# Allegro board fei.brd
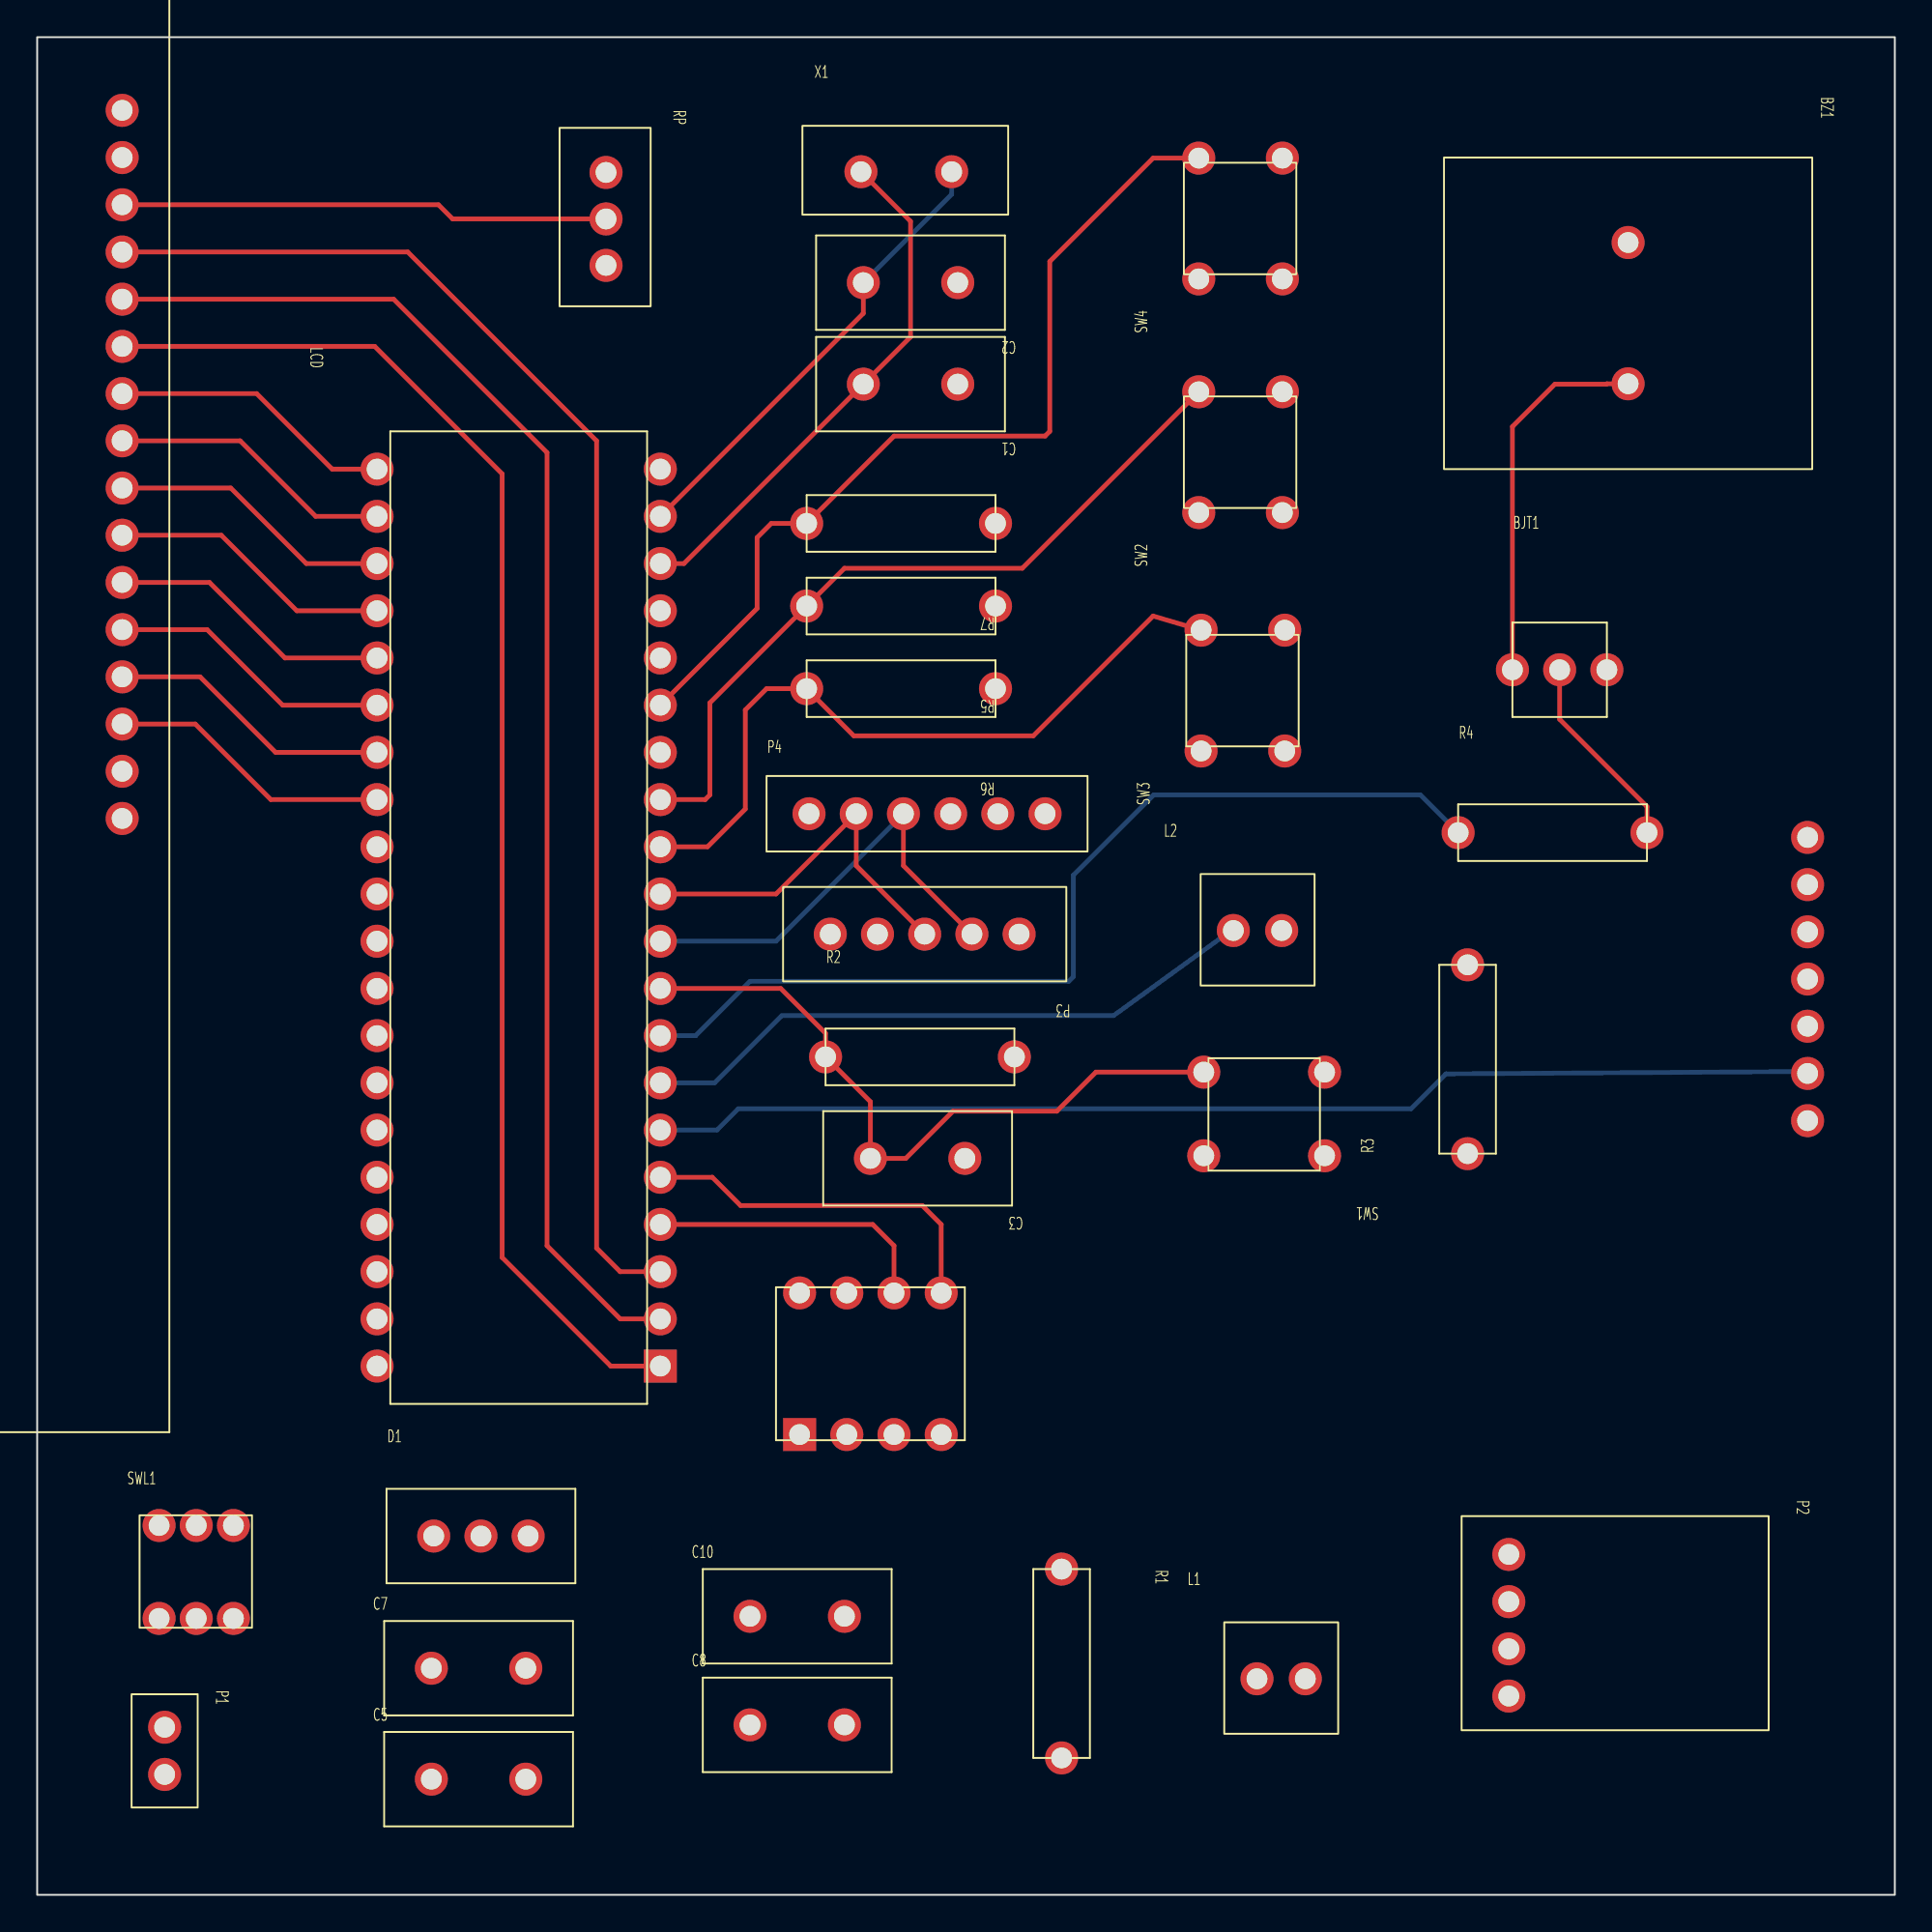
[diagram p0: board, top side]
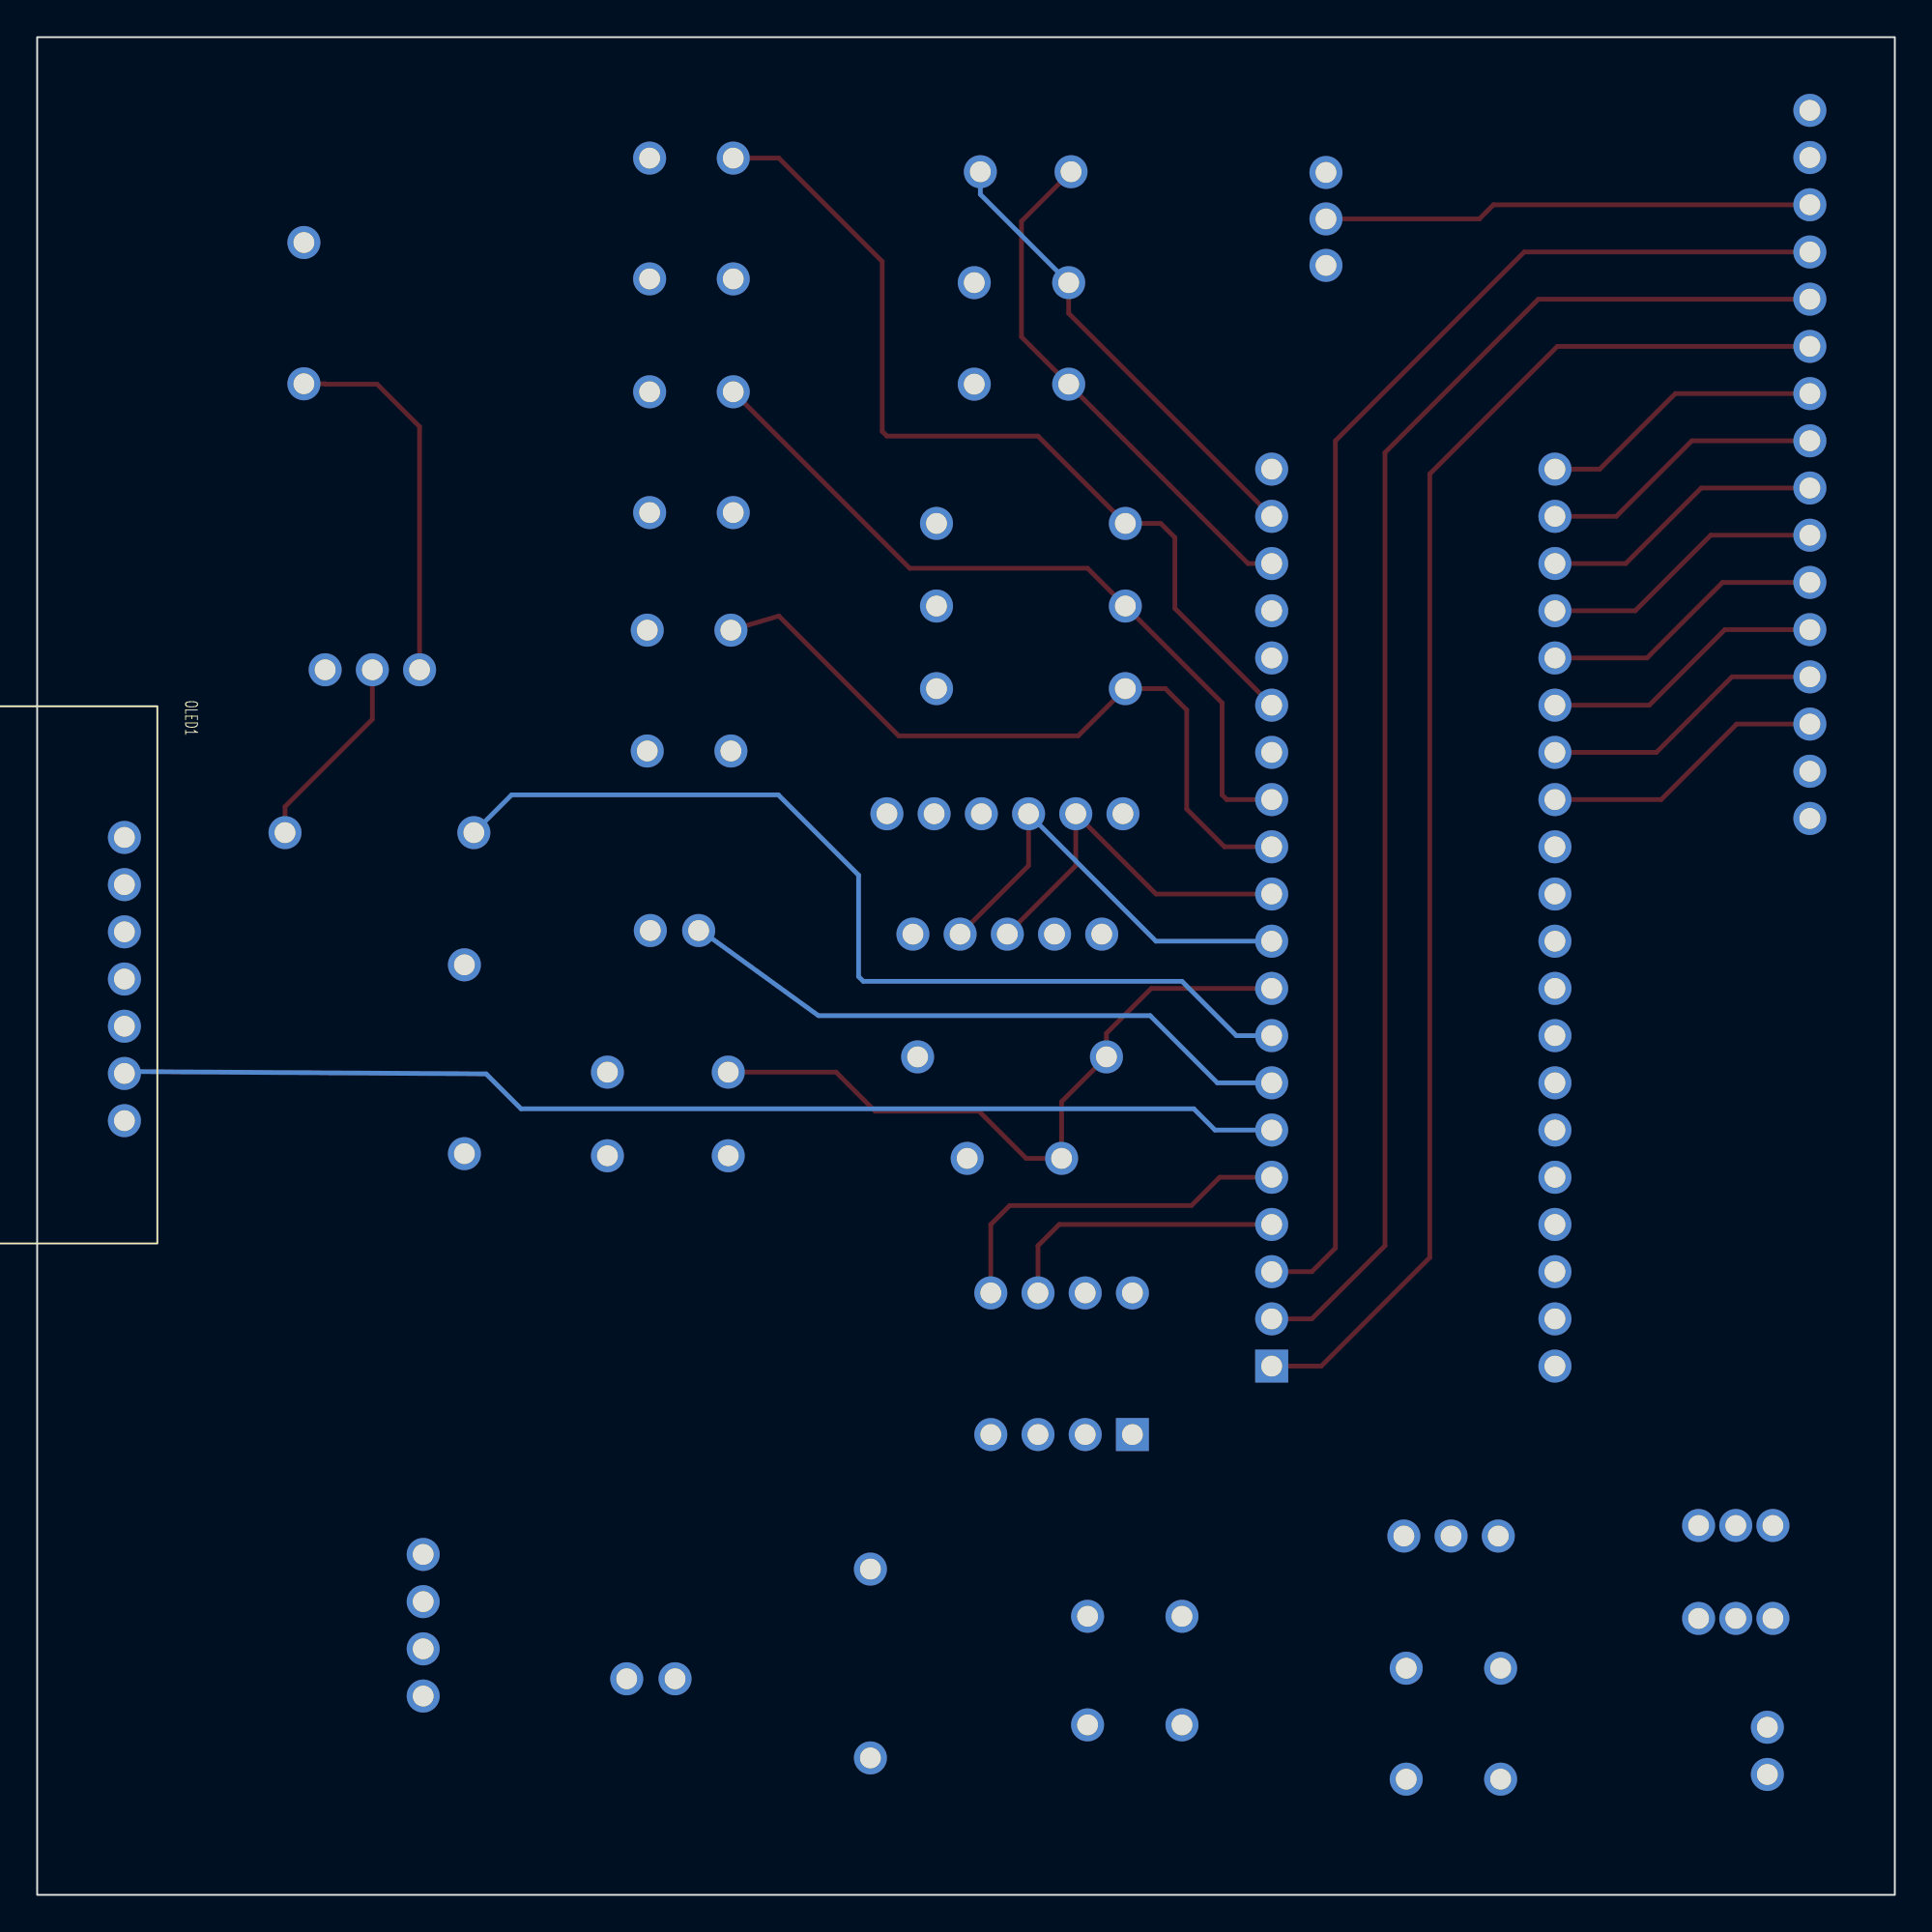
[diagram p1: board, bottom side, seen from below]

Outline 99.95 x 99.95 mm; copper layers: TOP, BOTTOM. Coordinates in mm from the lower left corner of the outline.
Outline path: rectangle 0,0 99.95,99.95

## Design rules (mm)
constraint set DEFAULT: min track width 0.127

## Placement (name value [footprint] x y rotation side)
AT1  -  [AT24C02]  44.83 28.57 90 top
BJT1  -  [BJT_PNP]  -139.06 -254.13 0 top
BZ1  -  [BUZZ]  85.6 85.09 270 top
C1  -  [CAPACITANCE]  46.99 81.28 180 top
C2  -  [CAPACITANCE]  46.99 86.74 180 top
C3  -  [CAPACITANCE]  47.37 39.62 180 top
C5  -  [CAPACITANCE]  23.75 6.22 0 top
C7  -  [CAPACITANCE]  23.75 12.19 0 top
C8  -  [CAPACITANCE]  40.89 9.14 0 top
C10  -  [CAPACITANCE]  40.89 14.99 0 top
D1  -  [L7805]  1.02 11.68 0 top
L1  -  [LED]  66.94 11.62 0 top
L2  -  [LED]  65.67 51.88 0 top
LCD  -  [LCD1602]  2.03 78.23 270 top
OLED1  -  [OLED]  108.23 49.4 270 bottom
P1  -  [SOCKET2]  6.86 7.75 270 top
P2  -  [MLX90614]  83.02 14.53 270 top
P3  -  [SOCKET5]  47.75 51.69 180 top
P4  -  [SOCKET6]  47.88 58.17 0 top
R1  -  [RESISTOR]  55.12 12.45 270 top
R2  -  [RESISTOR]  47.5 45.08 0 top
R3  -  [RESISTOR]  76.96 44.96 90 top
R4  -  [RESISTOR]  81.53 57.15 0 top
R5  -  [RESISTOR]  46.48 69.34 180 top
R6  -  [RESISTOR]  46.48 64.9 180 top
R7  -  [RESISTOR]  46.48 73.79 180 top
RP  -  [POTENTIOMETER]  30.61 90.17 270 top
SW1  -  [SWITCH]  65.97 41.96 180 top
SW2  -  [SWITCH]  64.7 77.67 90 top
SW3  -  [SWITCH]  64.82 64.84 90 top
SW4  -  [SWITCH]  64.7 90.24 90 top
SWL1  -  [SWITCH_LOCK]  8.56 17.42 0 top
U1  -  [DIP-40-100-600]  25.91 52.58 180 top
X1  -  [CRYSTAL]  46.86 92.71 0 top

## Library data of the parts
AT1 = AT24C02: part number: AT24C02-43010006,AT24C02
BJT1 = BJT_PNP: part number: BJT_PNP-15050001,BJT_PNP
BZ1 = BUZZ: part number: BUZZ-43010005,BUZZ
C1 C2 = CAPACITANCE: part number: CAPACITANCE-08070002,30P
C3 C5 C10 = CAPACITANCE: part number: CAPACITANCE-08070001,10U
C7 C8 = CAPACITANCE: part number: CAPACITANCE-08070004,0.1U
D1 = L7805: part number: L7805-43010004,L7805
L1 L2 = LED: part number: LED-15020001,LED
LCD = LCD1602: part number: LCD1602-15020001,LCD1602
OLED1 = OLED: part number: OLED-43010001,OLED
P1 = SOCKET2: part number: SOCKET2-14050003,SOCKET2
P2 = MLX90614: part number: MLX90614-43020001,MLX90614
P3 = SOCKET5: part number: SOCKET5-14050001,SOCKET5
P4 = SOCKET6: part number: SOCKET6-14050002,SOCKET6
R1 R3 = RESISTOR: part number: RESISTOR-07010004,330
R2 = RESISTOR: part number: RESISTOR-07010003,10K
R4-R7 = RESISTOR: part number: RESISTOR-07010001,1K
RP = POTENTIOMETER: part number: POTENTIOMETER-07080001,POTENTIOMETER
SW1-SW4 = SWITCH: part number: SWITCH-16100002,SWITCH
SWL1 = SWITCH_LOCK: part number: SWITCH_LOCK-16050001,SWITCH_LOCK
U1 = STC89C52: part number: STC89C52-41020001,STC89C52
X1 = CRYSTAL: part number: CRYSTAL-12010001,12.000MHZ

## Footprints (pads in the part's own frame, mm; a bottom-side part is the same pattern mirrored in y, then rotated)
AT24C02
  rect 1.778x1.778 hole 1.118: 1(-3.81,3.81)
  round 1.778 hole 1.118: 2(-3.81,1.27) 3(-3.81,-1.27) 4(-3.81,-3.81) 5(3.81,-3.81) 6(3.81,-1.27) 7(3.81,1.27) 8(3.81,3.81)
BJT_PNP
  round 1.778 hole 1.118: 1(218.44,320.04) 2(220.98,320.04) 3(223.52,320.04)
BUZZ
  round 1.778 hole 1.118: 1(-3.81,0) 2(3.79,0)
CAPACITANCE
  round 1.778 hole 1.118: 1(-2.54,0) 2(2.54,0)
CRYSTAL
  round 1.778 hole 1.118: 1(-2.54,0) 2(2.34,0)
DIP-40-100-600
  rect 1.778x1.778 hole 1.118: 1(-7.62,24.13)
  round 1.778 hole 1.118: 2(-7.62,21.59) 3(-7.62,19.05) 4(-7.62,16.51) 5(-7.62,13.97) 6(-7.62,11.43) 7(-7.62,8.89) 8(-7.62,6.35) 9(-7.62,3.81) 10(-7.62,1.27) 11(-7.62,-1.27) 12(-7.62,-3.81) 13(-7.62,-6.35) 14(-7.62,-8.89) 15(-7.62,-11.43) 16(-7.62,-13.97) 17(-7.62,-16.51) 18(-7.62,-19.05) 19(-7.62,-21.59) 20(-7.62,-24.13) 21(7.62,-24.13) 22(7.62,-21.59) 23(7.62,-19.05) 24(7.62,-16.51) 25(7.62,-13.97) 26(7.62,-11.43) 27(7.62,-8.89) 28(7.62,-6.35) 29(7.62,-3.81) 30(7.62,-1.27) 31(7.62,1.27) 32(7.62,3.81) 33(7.62,6.35) 34(7.62,8.89) 35(7.62,11.43) 36(7.62,13.97) 37(7.62,16.51) 38(7.62,19.05) 39(7.62,21.59) 40(7.62,24.13)
L7805
  round 1.778 hole 1.118: 1(20.32,7.62) 2(22.86,7.62) 3(25.4,7.62)
LCD1602
  round 1.778 hole 1.118: 1(-17.78,2.54) 2(-15.24,2.54) 3(-12.7,2.54) 4(-10.16,2.54) 5(-7.62,2.54) 6(-5.08,2.54) 7(-2.54,2.54) 8(0,2.54) 9(2.54,2.54) 10(5.08,2.54) 11(7.62,2.54) 12(10.16,2.54) 13(12.7,2.54) 14(15.24,2.54) 15(17.78,2.54) 16(20.32,2.54)
LED
  round 1.778 hole 1.118: 1(-1.31,0) 2(1.29,0)
MLX90614
  round 1.778 hole 1.118: 1(-3.78,-3.84) 2(-1.24,-3.84) 3(1.3,-3.84) 4(3.84,-3.84)
OLED
  round 1.778 hole 1.118: 1(-7.49,12.98) 2(-4.95,12.98) 3(-2.41,12.98) 4(0.13,12.98) 5(2.67,12.98) 6(5.21,12.98) 7(7.75,12.98)
POTENTIOMETER
  round 1.778 hole 1.118: 1(-2.5,0) 2(0,0) 3(2.5,0)
RESISTOR
  round 1.778 hole 1.118: 1(-5.08,0) 2(5.08,0)
SOCKET2
  round 1.778 hole 1.118: 1(-1.27,0) 2(1.27,0)
SOCKET5
  round 1.778 hole 1.118: 1(-5.08,0) 2(-2.54,0) 3(0,0) 4(2.54,0) 5(5.08,0)
SOCKET6
  round 1.778 hole 1.118: 1(-6.35,0) 2(-3.81,0) 3(-1.27,0) 4(1.27,0) 5(3.81,0) 6(6.35,0)
SWITCH
  round 1.778 hole 1.118: 1(-3.3,2.2) 2(3.2,2.2) 3(-3.3,-2.3) 4(3.2,-2.3)
SWITCH_LOCK
  round 1.778 hole 1.118: 1(-2,2.45) 2(0,2.45) 3(2,2.45) 4(-2,-2.55) 5(0,-2.55) 6(2,-2.55)

## Nets
3V3: P3.1 U1.38
GND: AT1.1 AT1.2 AT1.3 AT1.4 AT1.7(WP) BJT1.3 C1.1 C2.1 C5.2 C7.2 C8.2 C10.2 D1.2 L1.1 LCD.1 LCD.16 OLED1.1 OLED1.7 P1.2 P2.2 P3.4 P4.4 R2.2 RP.1 SW2.4 SW3.4 SW4.4 U1.20
VCC: AT1.8 BZ1.1 C3.1 C8.1 C10.1 D1.3(3/OUPUT) LCD.2 LCD.15 OLED1.2(VCC) P2.1(VCC) P3.5 P4.5(VCC) R1.1 R3.1 R5.1 R6.1 R7.1 RP.3 SW1.2 U1.31 U1.40
BUZZ: R4.1 U1.8
D0: LCD.7 U1.21
D1: LCD.8 U1.22
D2: LCD.9 U1.23
D3: LCD.10 U1.24
D4: LCD.11 U1.25
D5: LCD.12 U1.26
D6: LCD.13 U1.27
D7: LCD.14 U1.28
EN: P4.6
FUN: R7.2 SW4.2 U1.15
LCDE: LCD.6 U1.1
LED: L2.1 U1.7
RES: OLED1.5 U1.39
RS: LCD.4 U1.3
RST: C3.2 R2.1 SW1.4 U1.9
RW: LCD.5 U1.2
RXD: P3.2(TXD) P4.3 U1.10
SA: OLED1.6 U1.6
SCL: AT1.6 OLED1.3 P2.3 U1.4
SDA: AT1.5 OLED1.4 P2.4 U1.5
SET: R5.2 SW2.2 U1.13
STA: R6.2 SW3.2 U1.12
STATE: P4.1 U1.37
TXD: P3.3 P4.2 U1.11
UNNAMED_1_BJTPNP_I84_1: BJT1.1 BZ1.2(-)
UNNAMED_1_BJTPNP_I84_2: BJT1.2 R4.2
UNNAMED_1_CAPACITANCE_I46_1: C5.1 C7.1 D1.1 SWL1.6
UNNAMED_1_LCD1602_I59_VL: LCD.3(VL) RP.2(WIPER)
UNNAMED_1_LED_I33_2: L1.2 R1.2
UNNAMED_1_LED_I62_2: L2.2 R3.2
UNNAMED_1_SOCKET2_I54_V: P1.1(V+) SWL1.5
XTAL1: C2.2 U1.19 X1.2
XTAL2: C1.2 U1.18(XTAL2) X1.1

Pads without a net: SW1 1 3; SW2 1 3; SW3 1 3; SW4 1 3; SWL1 1 2 3 4; U1 14 16 17 29 30 32 33 34 35 36

## Via types
v1: diameter 0.61, hole 0.33, TOP to BOTTOM, 7 vias

## Routing (per net, layer and track width the routed paths; a pad name or vN(x,y) marks a point on that pad's centre or on a via; arc(x,y) is an arc through that point)
BUZZ: length 52.3
  BOTTOM w0.254: v1(33.53,46.23) 35.43,46.23 38.35,49.15 55.5,49.15 55.75,49.4 55.75,54.86 60.07,59.18 74.42,59.18 R4.1
D0: length 15.4
  TOP w0.254: U1.21 15.88,76.71 11.81,80.77 LCD.7
D1: length 15.4
  TOP w0.254: 18.29,74.17 14.99,74.17 10.92,78.23 LCD.8
D2: length 15.4
  TOP w0.254: 4.57,75.69 10.41,75.69 14.48,71.63 U1.23
D3: length 15.4
  TOP w0.254: U1.24 13.97,69.09 9.91,73.15 LCD.10
D4: length 15.4
  TOP w0.254: U1.25 13.33,66.55 9.27,70.61 LCD.11
D5: length 15.4
  TOP w0.254: 4.57,68.07 9.14,68.07 13.21,64.01 U1.26
D6: length 15.4
  TOP w0.254: LCD.13 8.76,65.53 12.83,61.47 18.29,61.47
D7: length 15.4
  TOP w0.254: U1.28 12.57,58.93 8.51,62.99 4.57,62.99
FUN: length 48.7
  TOP w0.254: SW4.2 60.04,93.44 54.48,87.88 54.48,78.74 54.23,78.49 46.1,78.49 R7.2 39.5,73.79 38.73,73.02 38.73,69.21 U1.15
LCDE: length 76.4
  TOP w0.254: U1.1 30.86,28.45 25.02,34.29 25.02,76.45 18.16,83.31 4.57,83.31
LED: length 33.9
  TOP w0.254: L2.1 v1(64.36,51.97)
  BOTTOM w0.254: U1.7 36.45,43.69 40.06,47.3 57.91,47.3 v1(64.36,51.97)
RS: length 77.1
  TOP w0.254: 33.53,33.53 31.37,33.53 30.1,34.8 30.1,78.23 19.94,88.39 LCD.4
RST: length 37.5
  TOP w0.254: SW1.4 56.96,44.26 54.86,42.16 49.28,42.16 46.74,39.62 v1(44.83,39.62) 44.83,42.67 R2.1 42.42,46.36 40,48.77 U1.9
RW: length 76.7
  TOP w0.254: LCD.5 19.18,85.85 27.43,77.6 27.43,34.92 31.37,30.99 33.53,30.99
RXD: length 23.9
  TOP w0.254: P3.2 46.61,55.37 v1(46.61,58.17)
  BOTTOM w0.254: v1(46.61,58.17) 39.75,51.31 U1.10
SA: length 63.1
  TOP w0.254: OLED1.6 v1(95.26,44.3)
  BOTTOM w0.254: v1(95.26,44.3) 75.79,44.17 73.91,42.29 37.72,42.29 36.58,41.15 U1.6
SCL: length 15.6
  TOP w0.254: U1.4 44.96,36.07 46.1,34.92 AT1.6
SDA: length 19.8
  TOP w0.254: 33.53,38.61 36.32,38.61 37.85,37.08 47.62,37.08 48.64,36.07 v1(48.64,32.38)
SET: length 41
  TOP w0.254: SW2.2 53,71.37 43.43,71.37 R5.2 36.19,64.13 36.19,59.18 35.94,58.93 U1.13
STA: length 39.6
  TOP w0.254: U1.12 36.07,56.39 38.1,58.42 38.1,63.75 39.24,64.9 R6.2 43.94,62.36 53.59,62.36 60.04,68.8 SW3.2
TXD: length 20.3
  TOP w0.254: 33.53,53.85 39.75,53.85 P4.2 44.07,55.37 P3.3
UNNAMED_1_BJTPNP_I84_1: length 20.3
  TOP w0.254: BJT1.1 79.37,78.99 81.66,81.28 84.43,81.28 84.46,81.3 BZ1.2
UNNAMED_1_BJTPNP_I84_2: length 10.7
  TOP w0.254: BJT1.2 81.91,63.25 86.61,58.55 v1(86.61,57.15)
UNNAMED_1_LCD1602_I59_VL: length 26.4
  TOP w0.254: RP.2 22.35,90.17 21.59,90.93 4.57,90.93
XTAL1: length 25
  TOP w0.254: C2.2 44.45,85.09 33.53,74.17
  BOTTOM w0.254: X1.2 49.2,91.49 C2.2
XTAL2: length 28.5
  TOP w0.254: X1.1 46.99,90.04 46.99,83.82 C1.2 34.8,71.63 U1.18
